# Altium PCB HC_SR04_PCB.PcbDoc
Units mm, origin at the board's own origin, x right, y up, seen from the top; angles counter-clockwise.
Board outline 46 x 38.8 mm, 2 copper layers (Top Layer, Bottom Layer), stack 1.571 mm thick; 58 components, 42 nets, 169 pads, 47 vias.
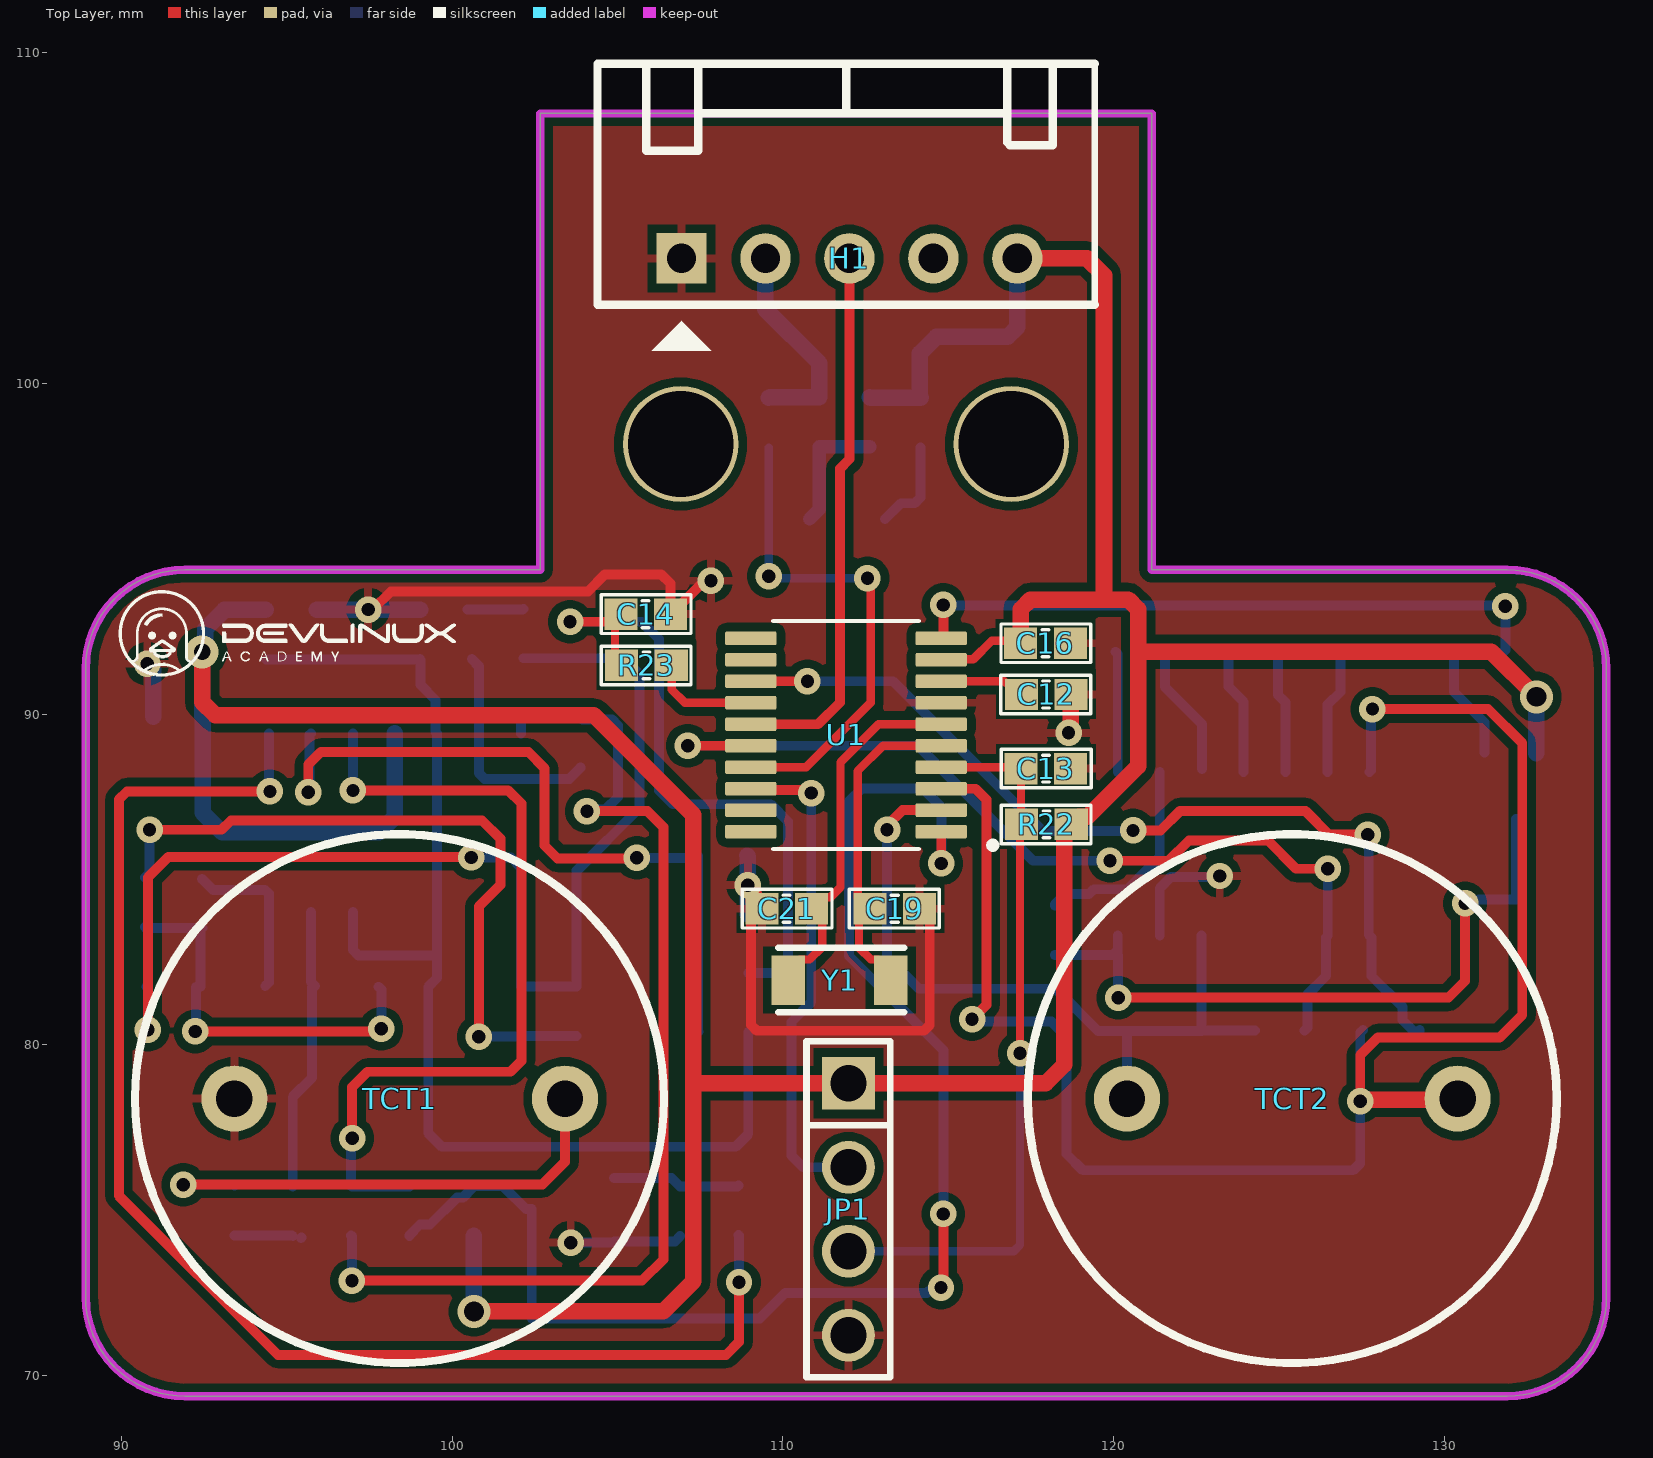
[diagram p0: Top Layer view]
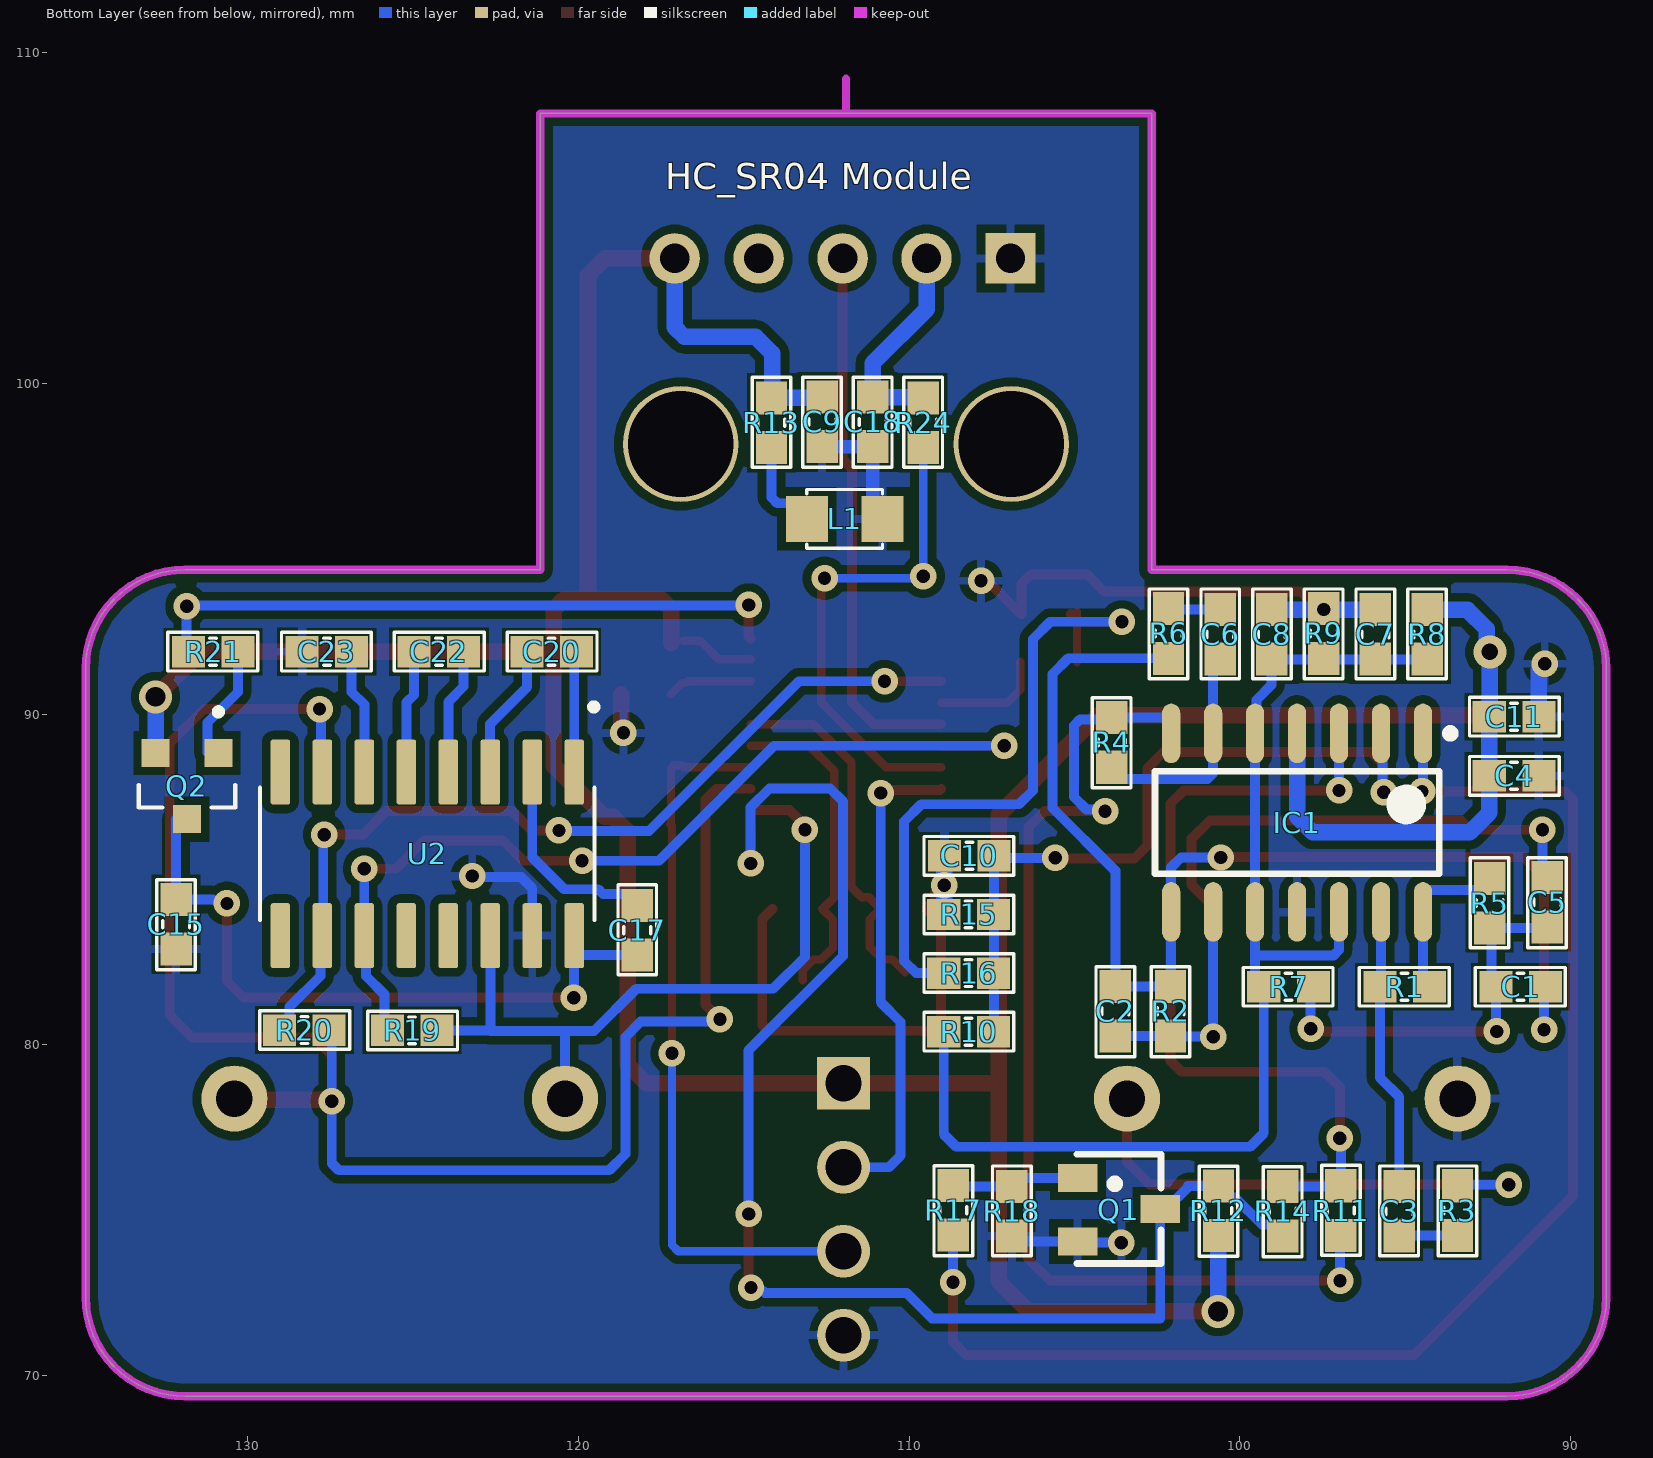
[diagram p1: Bottom Layer view, seen from below]
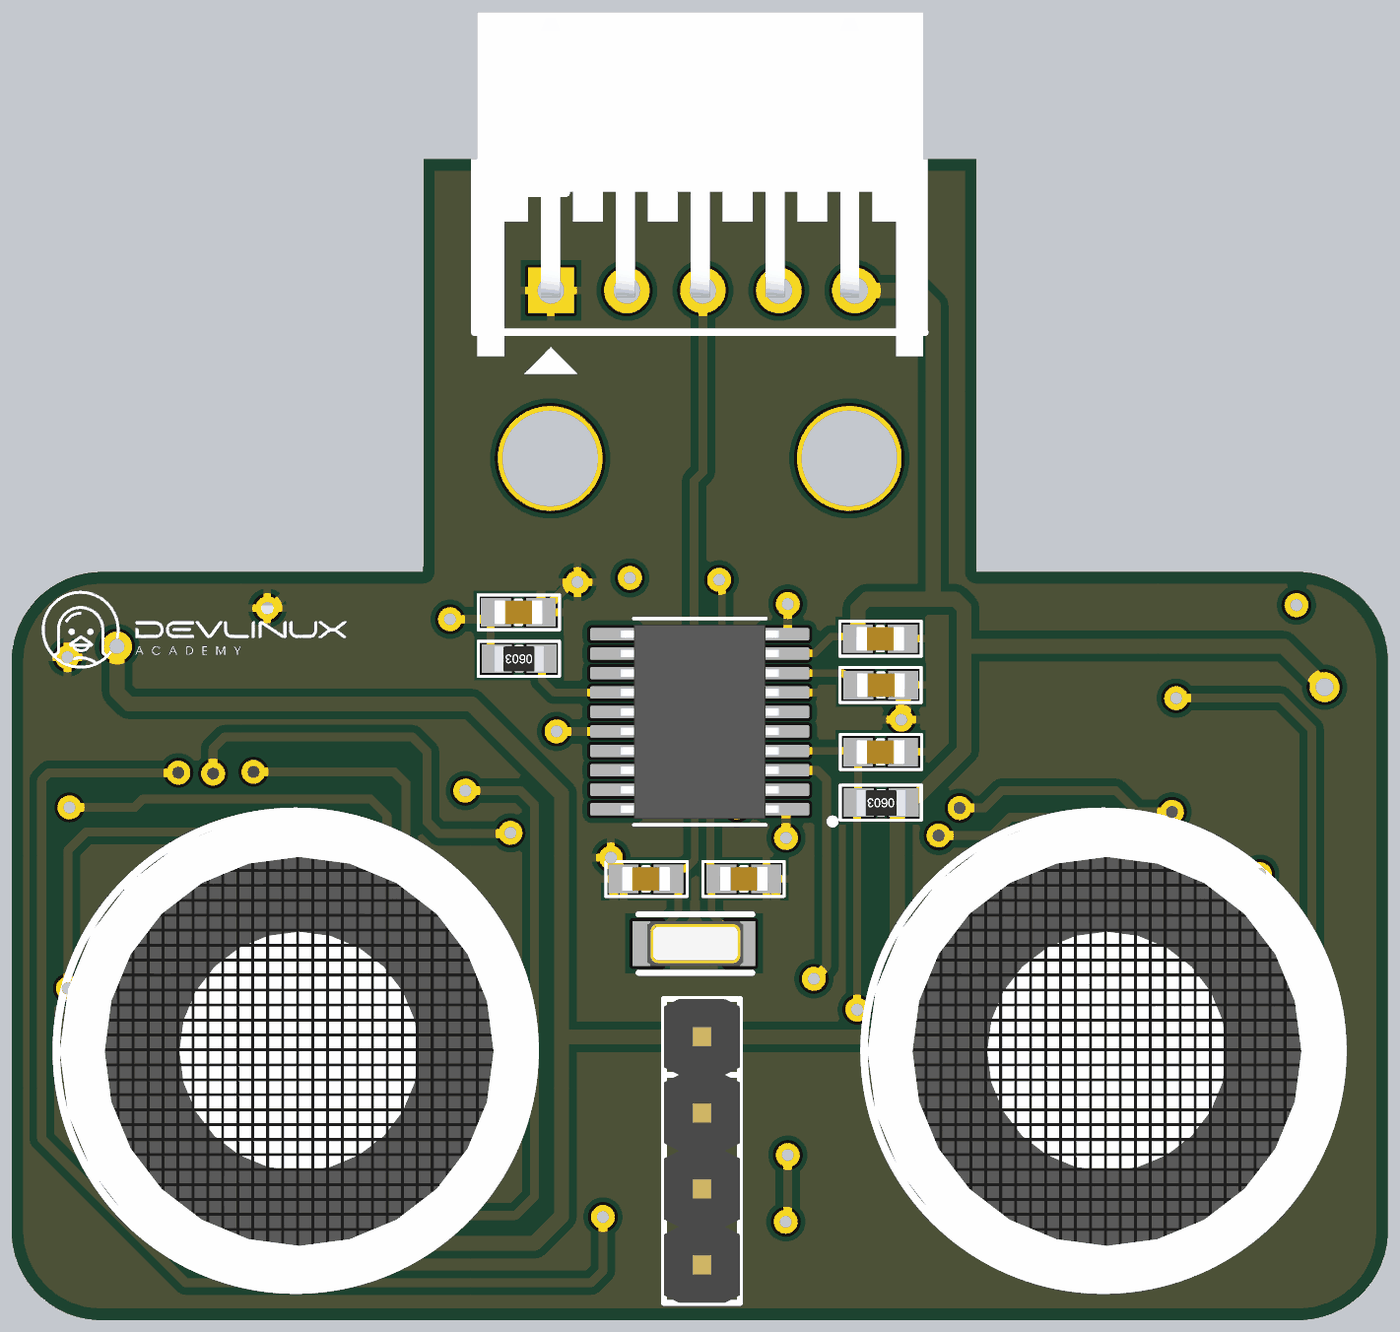
[diagram p2: 3D render of the assembled board from above, using the file's embedded part models]
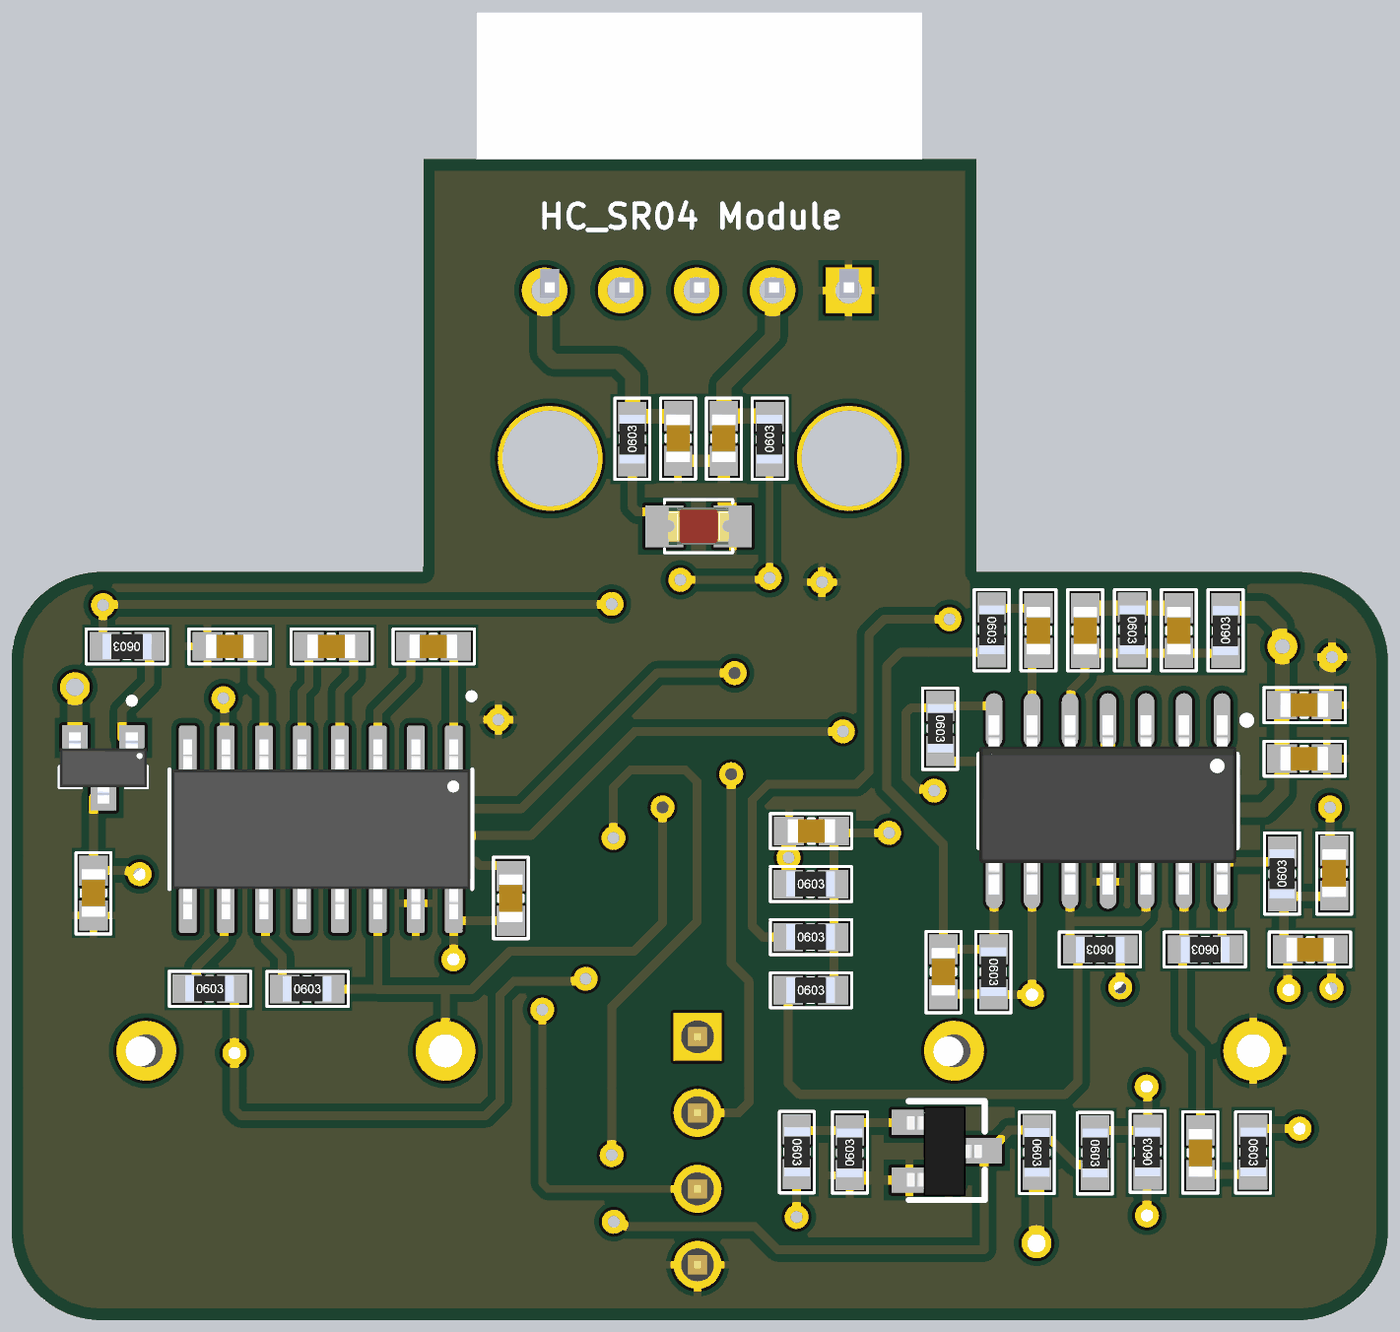
[diagram p3: 3D render of the assembled board from below, using the file's embedded part models]

## Layer stack, top to bottom
Top Solder: solder mask 0.0102, Solder Resist, Dk 3.5
Top Layer: signal copper 0.0356
Dielectric 1: dielectric 1.5, FR-4, Dk 4.8
Bottom Layer: signal copper 0.0356
Bottom Solder: solder mask 0.0102, Solder Resist, Dk 3.5

## Board outline
88.906,72.365 88.906,91.365 cw(c91.906,91.365) 91.906,94.365 102.656,94.365 102.656,108.165 121.156,108.165 121.156,94.365 131.906,94.365 cw(c131.906,91.365) 134.906,91.365 134.906,72.365 cw(c131.906,72.365) 131.906,69.365 91.906,69.365 cw(c91.906,72.365)

## Design rules (kind name [scope] priority, off if disabled: settings)
Clearance [All] p1: gap=0.254 ignorepadtopadclearanceinfootprint=FALSE except(0: Arc-Hole Track-Hole SMDPad-Hole THPad-Hole Via-Hole Fill-Hole Poly-Hole Region-Hole Text-Hole; 0.178: Arc-SMDPad Track-SMDPad SMDPad-SMDPad)
PolygonConnect [All] p1: connectstyle=Relief reliefconductorwidth=0.254 reliefentries=4 polygonreliefangle="90 Angle" airgapwidth=0.254
RoomDefinition HC_SR04_SCH [InComponentClass('HC_SR04_SCH')] p1: confinementstyle=ConfineIn formatcopy=TRUE lockcomponents=FALSE outline 178.943,26.924 487.172,26.924 487.172,45.212 178.943,45.212
RoutingVias [All] p1: holewidth=0.4 width=0.8 viastyle="Through Hole" minholewidth=0.3 minwidth=0.6 maxholewidth=0.5 maxwidth=1
SolderMaskExpansion [All] p1: expansion=0.102 istentingtop=FALSE
Width [All] p1: maxlimit=0.5 minlimit=0.254 preferedwidth=0.3
30 further rules are at their usual default settings.

## Components (designator, comment, footprint, x,y, rotation, side; value= is the part's Value field where it differs from the comment)
C1 "1nF" "tu 0603" 91.5,81.75 r0 bottom
C2 "12pF" "tu 0603" 103.76,81.008 r270 bottom
C3 "10nF" "tu 0603" 95.172,74.955 r90 bottom
C4 "100nF" "tu 0603" 91.7,88.13 r180 bottom
C5 "1nF" "tu 0603" 90.7,84.305 r270 bottom
C6 "10nF" "tu 0603" 100.586,92.41 r90 bottom
C7 "1.2uF" "tu 0603" 95.894,92.41 r90 bottom
C8 "150nF" "tu 0603" 99.022,92.41 r90 bottom
C9 "100nF" "tu 0603" 112.63,98.835 r270 bottom
C10 "10nF" "tu 0603" 108.175,85.71 r0 bottom
C11 "1.2uF" "tu 0603" 91.7,89.92 r180 bottom
C12 "1uF" "tu 0603" 117.96,90.59 r180 top
C13 "10nF" "tu 0603" 117.95,88.35 r0 top
C14 "10nF" "tu 0603" 105.845,93.02 r0 top
C15 "150nF" "tu 0603" 132.17,83.64 r270 bottom
C16 "100nF" "tu 0603" 117.94,92.14 r0 top
C17 "150nF" "tu 0603" 118.22,83.46 r90 bottom
C18 "10nF" "tu 0603" 111.1,98.835 r270 bottom
C19 "22pF" "tu 0603" 113.38,84.11 r180 top
C20 "150nF" "tu 0603" 120.81,91.883 r180 bottom
C21 "22pF" "tu 0603" 110.11,84.11 r0 top
C22 "150nF" "tu 0603" 124.223,91.883 r180 bottom
C23 "150nF" "tu 0603" 127.61,91.883 r0 bottom
H1 "Header 5P 2.54 Duc Cong" "Header 5P DC 2.54" 106.93,103.78 r90 top
IC1 "LM324 SOP14" "sop 14" 98.26,86.713 r270 bottom
JP1 "J_SWIM" "JP 1x4 DT" 111.98,78.83 r270 top
L1 "LED 0805" LED-0805-Red 113.09,95.9 r180 bottom
Q1 "BC847" SOT-23 103.65,75.03 r270 bottom value=C9014
Q2 "BC857A" TRANS_BC857A_RFG 131.84,87.82 r270 bottom
R1 "62k" "tro smd 0603" 95.01,81.75 r0 bottom
R2 "75k" "tro smd 0603" 102.09,81.008 r270 bottom
R3 "10k" "tro smd 0603" 93.41,74.98 r270 bottom
R4 "75k" "tro smd 0603" 103.87,89.14 r270 bottom
R5 "6.2k" "tro smd 0603" 92.44,84.28 r90 bottom
R6 "10k" "tro smd 0603" 102.15,92.435 r270 bottom
R7 "1k" "tro smd 0603" 98.52,81.75 r0 bottom
R8 "1k" "tro smd 0603" 94.33,92.41 r90 bottom
R9 "1k" "tro smd 0603" 97.458,92.435 r270 bottom
R10 "120k" "tro smd 0603" 108.2,80.39 r180 bottom
R11 "4.53k" "tro smd 0603" 96.935,74.98 r90 bottom
R12 "10k" "tro smd 0603" 100.64,74.97 r270 bottom
R13 "1k" "tro smd 0603" 114.16,98.81 r90 bottom
R14 "120k" "tro smd 0603" 98.697,74.955 r270 bottom
R15 "120k" "tro smd 0603" 108.2,83.937 r180 bottom
R16 "75k" "tro smd 0603" 108.2,82.163 r180 bottom
R17 "10k" "tro smd 0603" 108.66,74.99 r270 bottom
R18 "3.9k" "tro smd 0603" 106.89,74.955 r90 bottom
R19 "Spare R" "tro smd 0603" 125.03,80.43 r180 bottom
R20 "Spare R" "tro smd 0603" 128.29,80.44 r180 bottom
R21 "1k" "tro smd 0603" 131.048,91.883 r0 bottom
R22 "10k" "tro smd 0603" 117.97,86.66 r180 top
R23 "10k" "tro smd 0603" 105.87,91.47 r180 top
R24 "10k" "tro smd 0603" 109.57,98.81 r90 bottom
TCT1 "TCT40-16T/R" TCT40 98.406,78.365 r0 top
TCT2 "TCT40-16T/R" TCT40 125.406,78.365 r0 top
U1 "STM8S003F3P6" SOP65P640X120-20N 111.906,89.365 r180 top
U2 "MAX232AESET" SOIC127P600X175-16N 124.57,85.77 r270 bottom
Y1 "16MHz" "THACH ANH DAN 3215" 111.76,81.95 r0 top

## Footprints (in the part's own frame and the unit in brackets; to place one, negate y for a bottom-side part, rotate by r counter-clockwise, add the part's x,y. Pads: shape width x height; smd on the part's side, far side on the other; paste and mask are expansions set on the pad)
"Header 5P DC 2.54" [mil]
  rect 60x60 hole 35: 1(0,0)
  round 60 hole 35: 2(0,-100) 3(0,-200) 4(0,-300) 5(0,-400)
  silkscreen extent -110,-492 232,100, body extent -87,-490 366,97, height 240
"JP 1x4 DT" [mm] "4 pins, 1 row, straight, gold plating"
  rect 1.6x1.6 hole 1.1: 1(0,0)
  round 1.6 hole 1.1: 2(2.54,0) 3(5.08,0) 4(7.62,0)
  silkscreen extent -1.27,-1.27 8.89,1.27, body extent -1.27,-1.27 8.89,1.27, height 8.54
LED-0805-Red [mil]
  rect 50x55 smd: 1(0,0) 2(90,0)
  silkscreen extent 0,-35 90,35, body extent 5,-25 85,25, height 43
SOIC127P600X175-16N [mm]
  rrect25% 1.97x0.59 smd paste+0 mask+0.102: 1(-2.475,4.445) 2(-2.475,3.175) 3(-2.475,1.905) 4(-2.475,0.635) 5(-2.475,-0.635) 6(-2.475,-1.905) 7(-2.475,-3.175) 8(-2.475,-4.445) 9(2.475,-4.445) 10(2.475,-3.175) 11(2.475,-1.905) 12(2.475,-0.635) 13(2.475,0.635) 14(2.475,1.905) 15(2.475,3.175) 16(2.475,4.445)
  silkscreen extent -4.54,-5.06 2,5.13, body extent -3,-5 3,5, height 1.75
SOP65P640X120-20N [mm]
  rrect25% 1.56x0.41 smd: 1(-2.88,2.925) 2(-2.88,2.275) 3(-2.88,1.625) 4(-2.88,0.975) 5(-2.88,0.325) 6(-2.88,-0.325) 7(-2.88,-0.975) 8(-2.88,-1.625) 9(-2.88,-2.275) 10(-2.88,-2.925) 11(2.88,-2.925) 12(2.88,-2.275) 13(2.88,-1.625) 14(2.88,-0.975) 15(2.88,-0.325) 16(2.88,0.325) 17(2.88,0.975) 18(2.88,1.625) 19(2.88,2.275) 20(2.88,2.925)
  silkscreen extent -4.54,-3.45 2.2,3.45, body extent -3.2,-3.25 3.2,3.25, height 0.53
"sop 14" [mm] "SOIC, 14-Leads, Body 8.60x3.90mm, Pitch 1.27mm, IPC Medium Density"
  oval 1.8x0.55 smd: 1(-2.7,3.81) 2(-2.7,2.54) 3(-2.7,1.27) 4(-2.7,0) 5(-2.7,-1.27) 6(-2.7,-2.54) 7(-2.7,-3.81) 8(2.7,-3.81) 9(2.7,-2.54) 10(2.7,-1.27) 11(2.7,0) 12(2.7,1.27) 13(2.7,2.54) 14(2.7,3.81)
  silkscreen extent -2.82,-4.3 1.55,4.76, body extent -2.87,-4.3 3.13,4.3, height 1.75
SOT-23 [mm] "SOT 23 _ 1-3-2"
  rect 0.85x1.2 smd: 1(-0.94,-1.245) 2(0.985,-1.25) 3(0.005,1.25)
  silkscreen extent -1.65,-1.27 1.65,1.27, body extent -1.47,-1.33 1.53,1.17, height 1.06
TCT40 [mm]
  round 2 hole 1.1: 1(-5,0) 2(5,0)
  silkscreen extent -8.01,-8 7.99,8, body extent -7.89,-8.02 8.11,7.98, height 12
"THACH ANH DAN 3215" [mm] "Thach Anh Dan 5.08mm"
  rect 1x1.5 smd: 1(-1.6,0) 2(1.5,0)
  silkscreen extent -1.9,-0.98 1.9,0.97, body extent -1.6,-0.75 1.6,0.75, height 0.8
TRANS_BC857A_RFG [mm]
  rect 0.85x0.85 smd: 1(-1,0.95) 2(-1,-0.95) 3(1,0)
  silkscreen extent -2.35,-1.46 0.65,1.46, body extent -1.19,-1.46 1.19,1.46, height 1.12
"tro smd 0603" [mm] "Chip Capacitor, 2-Leads, Body 1,60x0,80mm, IPC Medium Density"
  rect 1x0.95 smd mask+0.076: 1(-0.75,0) 2(0.75,0)
  silkscreen extent -1.35,-0.58 1.37,0.58, body extent -0.82,-0.42 0.82,0.43, height 0.44
"tu 0603" [mm] "Chip Capacitor, 2-Leads, Body 1,60x0,80mm, IPC Medium Density"
  rect 1x0.95 smd mask+0.076: 1(-0.75,0) 2(0.75,0)
  silkscreen extent -1.35,-0.58 1.37,0.58, body extent -0.8,-0.4 0.8,0.4, height 0.9

## Part data
C1 C2 C4 C5 C6 C9 C10 C11 C12 C13 C14 C15 C16 C17 C18 C19 C20 C21 C22 C23: library part "Tu 0603 102 50V 10%", "Dán", Chung_Loai=Dán, Don_Vi=Con, Ma_Hang=MH004566, So_Chan=2, Ten_Linh_Kien="Tụ 0603 102-1nF 10% 50V"
C3: library part "Tu 0603 103 50V 10%", "Dán", Chung_Loai=Dán, Don_Vi=Con, Ma_Hang=MH004567, So_Chan=2, Ten_Linh_Kien="Tụ 0603 103-10nF 10% 50V"
C7 C8: library part "Tu 0603 104 50V 10%", "Dán", Chung_Loai=Dán, Don_Vi=Con, Ma_Hang=MH004568, So_Chan=2, Ten_Linh_Kien="Tụ 0603 104-100nF 10% 50V"
H1: "Cắm", Chung_Loai=Cắm, Don_Vi=Con, Ma_Hang=MH001308, Ten_Linh_Kien="Header 5P XH2.54-5P Đực Cong"
IC1: "Dán", Chung_Loai=Dán, Don_Vi=Con, Ma_Hang=MH002173, Ten_Linh_Kien="LM324 SOP14"
JP1: library part "JP 1x4 2.54 Duc Thang", "Cắm", Chung_Loai=Cắm, Don_Vi=Con, Ma_Hang=MH000903, Ten_Linh_Kien="Jump Đơn Đực 2.54MM 1x40P Thẳng 11MM"
L1: library part "LED 0805 Do", "Dán", Chung_Loai=Dán, Don_Vi=Con, Ma_Hang=MH000897, Ten_Linh_Kien="LED 0805 Màu Đỏ (Red)"
Q1: library part "Trans BC817", "SOT-23"
Q2: library part BC857A_RFG, "SOT-23, 200mW, PNP Bipolar Transistor", Package="SOT-23 Taiwan Semiconductor", Check_prices=https://www.snapeda.com/parts/BC857A%20RFG/Taiwan+Semiconductor/view-part/?ref=eda, MF="Taiwan Semiconductor", MP="BC857A RFG", SnapEDA_Link=https://www.snapeda.com/parts/BC857A%20RFG/Taiwan+Semiconductor/view-part/?ref=snap
R1 R2 R4 R5 R6 R7 R8 R9 R10 R11 R12 R13 R14 R15 R16 R17 R18 R19 R20 R21 R22 R23 R24: library part "Tro 0603 1% 1k", "Dán", Chung_Loai=Dán, Don_Vi=Con, Ma_Hang=MH006334, So_Chan=2, Ten_Linh_Kien="Trở 0603 1% 1k"
R3: library part "Tro 0603 1% 10k", "Dán", Chung_Loai=Dán, Don_Vi=Con, Ma_Hang=MH006333, So_Chan=2, Ten_Linh_Kien="Trở 0603 1% 10k"
TCT1 TCT2: "Piezoelectric Ceramic Ultrasonic Sensor"
U1: "STM8 series Microcontroller IC 8-Bit 16MHz 8KB (8K x 8) FLASH 20-TSSOP", Package="TSSOP-20 STMicroelectronics", Check_prices=https://www.snapeda.com/parts/STM8S003F3P6/STMicroelectronics/view-part/?ref=eda, MF=STMicroelectronics, MP=STM8S003F3P6, SnapEDA_Link=https://www.snapeda.com/parts/STM8S003F3P6/STMicroelectronics/view-part/?ref=snap
U2: "Dual Transmitter/Receiver RS-232 16-Pin SOIC N Tube", Package="SOIC-16 Maxim Integrated", Check_prices=https://www.snapeda.com/parts/MAX232AESE+/Analog+Devices/view-part/?ref=eda, MF="Analog Devices", MP=MAX232AESE+, SnapEDA_Link=https://www.snapeda.com/parts/MAX232AESE+/Analog+Devices/view-part/?ref=snap
Y1: library part "Thach Anh SMD 3225", "C700805", Chung_Loai=Dán, Don_Vi=Con, Ma_Hang=MH001979, Ten_Linh_Kien="Thạch Anh 16Mhz SMD5032"

## Free pads (board coordinates)
  round 3.5 hole 3.2: 2(106.906,98.165) 2(116.906,98.165)

## Via types
v1: diameter 0.8, hole 0.4, Top Layer to Bottom Layer, 44 vias
v2: diameter 1, hole 0.6, Top Layer to Bottom Layer, 2 vias
v3: diameter 1, hole 0.5, Top Layer to Bottom Layer, 1 vias

## Nets (pads, with @x,y where several pads share a name; then routed paths per layer and width w, separated by ;. In a path a pad name is that pad's centre, name@x,y a point inside that pad or via, vN(x,y) a via of type N, cw(c..) or ccw(c..) an arc to the next point about the centre after c; other vN are vias at no path point)
+5: C4.1 C9.1 C11.1 C16.1 H1.5 IC1.4 JP1.1 Q2.2 R8.2 R12.2 R13.2 R22.1 U1.9 | length 126.3
  Top Layer w0.254: U1.9 114.802,91.656 115.756,91.656 116.31,92.21 116.82,92.21 C16.1@116.83,92.22
  Top Layer w0.5: v3(92.43,91.88) 92.43,90.36 92.83,89.96 104.28,89.96 107.29,86.95 107.29,78.83 ; v2(100.65,71.93) 106.38,71.93 107.29,72.84 107.29,78.83 ; H1.5 119.2,103.78 119.71,103.27 119.71,93.46 ; C16.1 117.19,93.167 117.483,93.46 119.71,93.46 ; v2(132.79,90.52) 131.42,91.89 120.74,91.89 ; 107.29,78.83 JP1.1 117.95,78.83 118.51,79.39 118.51,86.45 118.945,86.885 119.205,86.885 120.74,88.42 120.74,91.89 ; 119.71,93.46 120.447,93.46 120.74,93.167 120.74,91.89
  Bottom Layer w0.5: R8.2@94.36,93.15 93.105,93.15 92.526,92.571 92.526,91.976 v3(92.43,91.88) 92.44,91.87 92.44,89.93 C11.1 C4.1 92.45,87.01 93.04,86.42 97.79,86.42 98.26,86.89 IC1.4 ; R12.2 100.645,74.215 100.645,71.935 v2(100.65,71.93) ; C9.1 112.643,99.573 R13.2@114.147,99.573 ; R13.2 R13.2@114.147,99.573 ; H1.5 117.09,101.703 116.797,101.41 114.64,101.41 114.142,100.912 114.142,99.578 R13.2@114.147,99.573 ; Q2.2 v2(132.79,90.52)
A_OUT: C18.1 H1.2 R24.2 | length 6.4
  Bottom Layer w0.5: H1.2 109.47,102.24 111.1,100.61 C18.1 109.595,99.585 R24.2
A_OUT_1: R24.1 U1.17 | length 15.1
  Top Layer w0.254: U1.17 110.7,88.39 112.65,90.34 112.65,94.01 v1(112.555,94.105)
  Bottom Layer w0.254: R24.1 v1(109.57,94.17) 109.635,94.105 v1(112.555,94.105)
D_OUT: H1.3 U1.15 | length 16.5
  Top Layer w0.3: U1.15 111.06,89.69 111.72,90.35 111.72,91.337 111.72,97.42 112.01,97.71 H1.3
GND: C4.2 C7.2 C8.2 C9.2 C10.2 C11.2 C12.1 C13.2 C14.2 C15.2 C16.2 C18.2 C19.1 C21.1 C23.2 H1.1 IC1.11 JP1.4 L1.2 Q1.2 R9.1 R15.1 R18.1 TCT1.1 U1.7 U2.15 | length 44.2
  Top Layer w0.3: v1(97.453,93.16) 97.588,93.16 98.138,93.71 104.1,93.71 104.61,94.22 106.318,94.22 106.595,93.943 C14.2 106.62,93.02 107.63,94.03 v1(107.82,94.03) ; C21.1@109.335,84.11 109.03,83.805 109.03,80.596 109.206,80.42 114.264,80.42 114.44,80.596 114.44,83.8 C19.1
  Top Layer w0.5: v1@108.937,84.742 v1(108.937,84.823) ; C21.1@109.11,84.569 109.11,84.335 109.335,84.11 C21.1 ; v1(118.64,89.43) 118.71,89.5 C12.1
  Bottom Layer w0.3: v1(97.453,93.16) 97.458,93.165 R9.1 ; v1(103.58,74.01) 104.866,74.01 Q1.2 106.73,74.045 R18.1 ; U2.15 121.395,84.73 121.73,85.065 123.175,85.065 v1(123.21,85.1)
  Bottom Layer w0.4: L1.2 111.1,96.196 C18.2 C9.2
  Bottom Layer w0.5: v1(90.77,91.52) 90.95,91.34 C11.2 ; C7.2 v1(97.453,93.16) 99.012,93.16 C8.2@99.022,93.15 ; C10.2 108.937,85.697 v1(108.937,84.823) 108.937,83.949 R15.1
IN1+: IC1.3 R11.2 R14.1 | length 25
  Top Layer w0.3: v1(96.97,77.17) 96.97,78.72 97.43,79.18 101.76,79.18 102.09,79.51 102.09,87.29 101.69,87.69 v1(96.99,87.69)
  Bottom Layer w0.3: v1(96.97,77.17) 96.935,77.135 R11.2 96.96,75.705 R14.1 ; v1(96.99,87.69) IC1.3
IN1-: C10.1 IC1.2 R10.2 R15.2 R16.2 | length 22.7
  Top Layer w0.3: v1(95.64,87.63) 95.64,88.47 96.02,88.85 102.3,88.85 102.79,88.36 102.79,86.02 103.18,85.63 105.56,85.63 v1(105.58,85.65)
  Bottom Layer w0.3: v1(95.64,87.63) 95.68,87.67 95.68,89.373 IC1.2 ; v1(105.58,85.65) 107.365,85.65 C10.1 107.425,83.937 107.425,82.163 107.425,80.415 R10.2
IN2+: C7.1 C8.1 IC1.5 IC1.10 IC1.12 R7.2 R8.1 R9.2 R10.1 | length 36.2
  Bottom Layer w0.3: R8.1@94.36,91.65 C8.1@99.022,91.65 ; IC1.12 96.99,82.866 97.166,82.69 99.53,82.69 ; C8.1 C8.1@99.022,91.65 ; R10.1 108.95,77.29 108.57,76.91 99.68,76.91 99.27,77.32 R7.2 99.53,82.01 99.53,82.69 ; C8.1@99.022,91.65 99.034,91.638 99.034,90.886 99.493,90.427 99.493,89.45 IC1.5 99.53,82.69
IN2-: C6.1 IC1.6 R4.2 | length 6.8
  Bottom Layer w0.3: C6.1 100.8,91.446 100.8,88.216 100.976,88.04 103.545,88.04 103.87,88.365 R4.2
IN3-: C2.2 C5.1 IC1.9 R2.2 | length 25.5
  Top Layer w0.3: v1(90.84,86.5) 93.02,86.5 93.3,86.78 100.9,86.78 101.45,86.23 101.45,84.83 100.8,84.18 v1(100.8,80.24)
  Bottom Layer w0.3: C5.1 90.84,85.195 v1(90.84,86.5) ; IC1.9 v1(100.8,80.24) 102.072,80.24 R2.2 C2.2
IN4-: C3.2 IC1.13 R1.2 | length 8.6
  Bottom Layer w0.3: C3.2 95.172,78.422 95.76,79.01 R1.2 ; IC1.13 95.72,81.89 R1.2@95.84,81.77
NetC1_2: C1.2 C5.2 R5.1 R7.1 | length 11.9
  Top Layer w0.3: v1(92.22,80.4) 97.77,80.4 v1(97.85,80.48)
  Bottom Layer w0.3: C5.2 90.725,83.53 R5.1 92.38,83.47 C1.2@92.38,81.75 ; v1(92.22,80.4) 92.25,80.43 C1.2 ; R7.1 97.85,81.67 v1(97.85,80.48)
NetC3_1: C3.1 R3.2 | length 1.8
  Bottom Layer w0.3: R3.2 95.147,74.23 C3.1 ; C3.1@95.42,74.15 C3.1@95.43,74.16
NetC6_2: C6.2 R6.1 | length 1.7
  Bottom Layer w0.3: C6.2@100.46,93.155 102.125,93.155 R6.1@102.15,93.18
NetC15_1: C15.1 C17.1 Q2.3 U2.16 | length 20.9
  Top Layer w0.3: v1(120.14,81.42) 130.13,81.42 130.63,81.92 v1(130.63,84.27)
  Bottom Layer w0.3: C17.1 119.98,82.71 120.053,82.783 U2.16@120.125,82.855 ; U2.16 U2.16@120.125,82.855 ; v1(120.14,81.42) 120.133,81.428 120.133,82.703 120.125,82.71 U2.16@120.125,82.855 ; v1(130.63,84.27) 130.726,84.366 131.031,84.366 131.055,84.39 C15.1 Q2.3@132.17,86.83
NetC17_2: C17.2 U2.2 | length 6.4
  Bottom Layer w0.3: C17.2 118.22,84.235 118.545,84.56 119.26,84.56 119.4,84.7 120.43,84.7 121.395,85.665 U2.2
NetC20_1: C20.1 U2.3 | length 4
  Bottom Layer w0.3: C20.1 121.56,90.81 122.669,89.701 U2.3@122.669,88.331
NetC20_2: C20.2 U2.1 | length 3.7
  Bottom Layer w0.3: C20.2 120.125,91.818 U2.1
NetC22_1: C22.1 U2.5 | length 3.7
  Bottom Layer w0.3: C22.1 124.973,90.577 125.205,90.345 U2.5
NetC22_2: C22.2 U2.4 | length 3.8
  Bottom Layer w0.3: C22.2 123.473,90.827 123.935,90.365 U2.4
NetC23_1: C23.1 U2.6 | length 3.8
  Bottom Layer w0.3: U2.6 126.475,90.285 126.86,90.67 C23.1
NetL1_1: L1.1 R13.1 | length 2.8
  Bottom Layer w0.3: L1.1 113.566,96.376 113.984,96.376 114.16,96.551 R13.1
NetQ1_1: Q1.1 R17.1 R18.2 | length 3.9
  Bottom Layer w0.3: Q1.1 106.625,75.97 R18.2 108.625,75.705 R17.1
NetQ2_1: Q2.1 R21.1 | length 3.4
  Bottom Layer w0.3: R21.1 130.298,90.662 131.22,89.74 Q2.1@131.22,88.83
NetR3_1: R3.1 TCT1.2 | length 15.3
  Top Layer w0.3: v1(91.86,75.76) 91.874,75.774 102.725,75.774 103.406,76.455 TCT1.2
  Bottom Layer w0.3: v1(91.86,75.76) 93.38,75.76 R3.1
NRST: C13.1 JP1.3 R22.2 U1.4 | length 22.1
  Top Layer w0.254: U1.4 C13.1@116.827,88.39 ; C13.1@116.86,88.45 117.1,88.45 C13.1 117.2,86.68 R22.2 117.17,86.61 v1(117.17,79.74)
  Bottom Layer w0.254: JP1.3 116.98,73.75 117.17,73.94 v1(117.17,79.74)
OSC_IN: C19.2 U1.5 Y1.2 | length 10
  Top Layer w0.254: Y1.2@113.22,81.94 113.22,82.24 112.887,82.573 112.657,82.573 112.3,82.93 112.3,83.78 C19.2 112.608,84.11 112.26,84.458 112.26,88.27 113.03,89.04 U1.5
OSC_OUT: C21.2 U1.6 Y1.1 | length 11.1
  Top Layer w0.254: Y1.1@110.12,82.19 110.503,82.573 110.803,82.573 111.19,82.96 111.19,83.78 C21.2 111.208,84.458 111.438,84.458 111.74,84.76 111.74,88.54 112.89,89.69 U1.6
OUT1: IC1.1 R17.2 | length 42.6
  Top Layer w0.3: v1(94.48,87.66) 90.16,87.66 89.91,87.41 89.91,75.43 94.724,70.616 108.276,70.616 108.67,71.01 v1(108.67,72.81)
  Bottom Layer w0.3: IC1.1 94.45,87.69 v1(94.48,87.66) ; R17.2 108.67,74.23 v1(108.67,72.81)
OUT2: IC1.7 R4.1 R11.1 | length 33.4
  Top Layer w0.3: v1(96.96,72.86) 105.74,72.86 106.384,73.504 106.384,86.576 105.9,87.06 v1(104.07,87.06)
  Bottom Layer w0.3: R11.1 96.96,74.205 v1(96.96,72.86) ; IC1.7 102.07,89.775 102.185,89.89 R4.1 103.93,89.83 104.834,89.83 105.01,89.654 105.01,87.49 104.626,87.106 104.116,87.106 v1(104.07,87.06)
OUT3: C1.1 C2.1 IC1.8 R2.1 R6.2 | length 36.8
  Top Layer w0.3: v1(90.79,80.45) 90.79,85.06 91.41,85.68 100.55,85.68 v1(100.57,85.66)
  Bottom Layer w0.3: C1.1 90.79,81.71 v1(90.79,80.45) ; v1(100.57,85.66) 101.773,85.66 102.07,85.363 102.07,81.778 R2.1 C2.1 103.76,85.26 105.66,87.16 105.66,91.21 105.184,91.685 R6.2
OUT4: IC1.14 R1.1 R5.2 | length 5.1
  Bottom Layer w0.3: R5.2@92.42,85.01 92.435,85.01 92.765,84.68 94.335,84.68 94.45,84.565 94.45,81.88 R1.1@94.34,81.77
PWM: R23.1 U1.14 | length 3.4
  Top Layer w0.254: R23.1@106.63,91.58 106.63,90.74 107.03,90.34 U1.14
PWR_ON: R21.2 U1.10 | length 19.5
  Top Layer w0.3: U1.10 114.795,92.29 114.85,92.345 v1(114.85,93.3)
  Bottom Layer w0.3: v1(114.85,93.3) 114.87,93.28 131.83,93.28 v1(131.85,93.26) 131.85,91.935 R21.2
SET1: R19.2 TCT2.1 U1.2 U2.14 | length 22.8
  Top Layer w0.3: v1(113.15,86.5) 113.15,86.623 113.617,87.09 U1.2
  Bottom Layer w0.3: v1(113.15,86.5) 113.15,82.65 114.11,81.69 118.251,81.69 119.531,80.41 120.35,80.41 ; TCT2.1 120.406,80.354 120.35,80.41 ; 122.665,80.41 120.35,80.41 ; U2.14 122.665,80.43 R19.2
SET2: R20.2 TCT2.2 U1.3 U2.7 | length 53.1
  Top Layer w0.3: U1.3 115.82,87.74 116.15,87.41 116.15,81.2 v1(115.72,80.77) ; v1(127.46,78.29) 127.46,79.69 127.99,80.22 131.68,80.22 132.36,80.9 132.36,89.12 131.33,90.15 v1(127.83,90.15)
  Top Layer w0.5: v1(127.46,78.29) 127.497,78.328 130.369,78.328 TCT2.2
  Bottom Layer w0.3: v1(115.72,80.77) 115.796,80.694 118.116,80.694 118.58,80.23 118.58,76.686 119.066,76.2 127.25,76.2 127.46,76.41 v1(127.46,78.29) 127.46,80.36 R20.2 ; U2.7 127.787,88.287 127.787,90.107 v1(127.83,90.15)
SIG: Q1.3 R12.1 R14.2 U1.1 | length 42.5
  Top Layer w0.3: v1(114.78,72.65) 114.85,72.72 v1(114.85,74.88) ; U1.1 114.786,85.484 v1(114.79,85.48)
  Bottom Layer w0.3: R14.2 98.697,74.23 99.022,74.555 99.325,74.555 100.14,75.37 100.315,75.37 100.64,75.695 R12.1 101.57,75.72 101.57,75.68 102.225,75.025 Q1.3 102.4,71.72 109.3,71.72 110.07,72.49 114.354,72.49 114.419,72.554 114.684,72.554 v1(114.78,72.65) ; v1(114.79,85.48) 114.79,87.18 114.22,87.75 112.39,87.75 112,87.36 112,82.68 114.85,79.83 v1(114.85,74.88)
SWIM: JP1.2 U1.18 | length 15
  Top Layer w0.3: U1.18 109.067,87.699 110.766,87.699 v1(110.855,87.609)
  Bottom Layer w0.3: v1(110.855,87.609) 110.854,87.608 110.854,81.28 110.26,80.686 110.26,76.64 110.61,76.29 JP1.2
THD: C14.1 R16.1 R23.2 | length 20.5
  Top Layer w0.254: R23.2@104.92,91.57 C14.1@104.92,93.1
  Top Layer w0.3: v1(103.56,92.79) 104.865,92.79 C14.1
  Bottom Layer w0.3: v1(103.56,92.79) 105.73,92.79 106.25,92.27 106.25,87.69 106.67,87.27 109.63,87.27 110.154,86.746 110.154,82.534 109.783,82.163 R16.1
TX1: R19.1 U1.16 U2.11 | length 28.5
  Top Layer w0.3: v1(107.12,89.04) U1.16 ; v1(119.89,85.56) 121.67,85.56 122.28,86.17 124.67,86.17 125.52,85.32 v1(126.48,85.32)
  Bottom Layer w0.3: v1(107.12,89.04) 114.08,89.04 117.56,85.56 v1(119.89,85.56) ; R19.1 125.86,80.51 125.86,81.51 126.423,82.073 126.423,83.243 126.477,83.298 126.477,85.317 v1(126.48,85.32)
TX2: R20.1 U1.13 U2.10 | length 27.7
  Top Layer w0.3: U1.13 v1(110.74,90.99) ; v1(120.591,86.48) 121.42,86.48 122,87.06 125.81,87.06 126.52,86.35 v1(127.69,86.35)
  Bottom Layer w0.3: v1(110.74,90.99) 113.33,90.99 117.86,86.46 120.571,86.46 v1(120.591,86.48) ; v1(127.69,86.35) 127.717,86.323 127.717,83.323 127.802,83.238 127.802,82.078 128.734,81.146 128.734,80.746 R20.1 ; R20.1@129.26,80.25 R20.1@129.26,80.44
VCAP: C12.2 U1.8 | length 2.6
  Top Layer w0.254: U1.8 116.688,90.99 116.74,90.938 116.862,90.938 C12.2
pads on no net: H1.4 U1.11 U1.12 U1.19 U1.20 U2.8 U2.9 U2.12 U2.13

## Polygon pours and split planes (outlines as drawn)
GND on Bottom Layer "GND_L02_P001" (solid, remove dead copper, pour order 1): 84.33,115.06 86.15,113.24 139.47,113.24 139.47,66.07 139.21,65.81 138.35,66.67 87.45,66.67
GND on Top Layer "GND_L01_P000" (solid, remove dead copper, pour order 0): 84.07,114.54 137.39,114.54 141.63,110.3 140.86,109.53 140.86,66.15 88.92,66.15 86.93,64.16

## Keep-outs
Keep-Out Layer:
  lines w0.254: 91.906,94.365 ccw(c91.906,91.365) 88.906,91.365 88.906,72.365 ccw(c91.906,72.365) 91.906,69.365 131.906,69.365 ccw(c131.906,72.365) 134.906,72.365 134.906,91.365 ccw(c131.906,91.365) 131.906,94.365 121.156,94.365 121.156,108.165 102.656,108.165 102.656,94.365 91.906,94.365 ; 111.906,108.165 111.906,109.214

## Silkscreen, mask and mechanical layers (free items; w line width, h text height)
Top Overlay:
  drawing of 21 lines, arcs and shapes, not listed
Bottom Overlay:
  text "HC_SR04 Module" at 117.38,105.873 h0.8
Mechanical 13:
  lines w0.254: 98.406,78.365 111.906,78.365 ; 111.906,69.365 111.906,78.365 ; 111.906,89.365 111.906,78.365 ; 125.406,78.365 111.906,78.365